# Altium PCB PCB1.PcbDoc
Units mm, origin at the board's own origin, x right, y up, seen from the top; angles counter-clockwise.
Board outline 50 x 50 mm, 2 copper layers (Top Layer, Bottom Layer); 9 components, 6 nets, 20 pads, 0 vias.
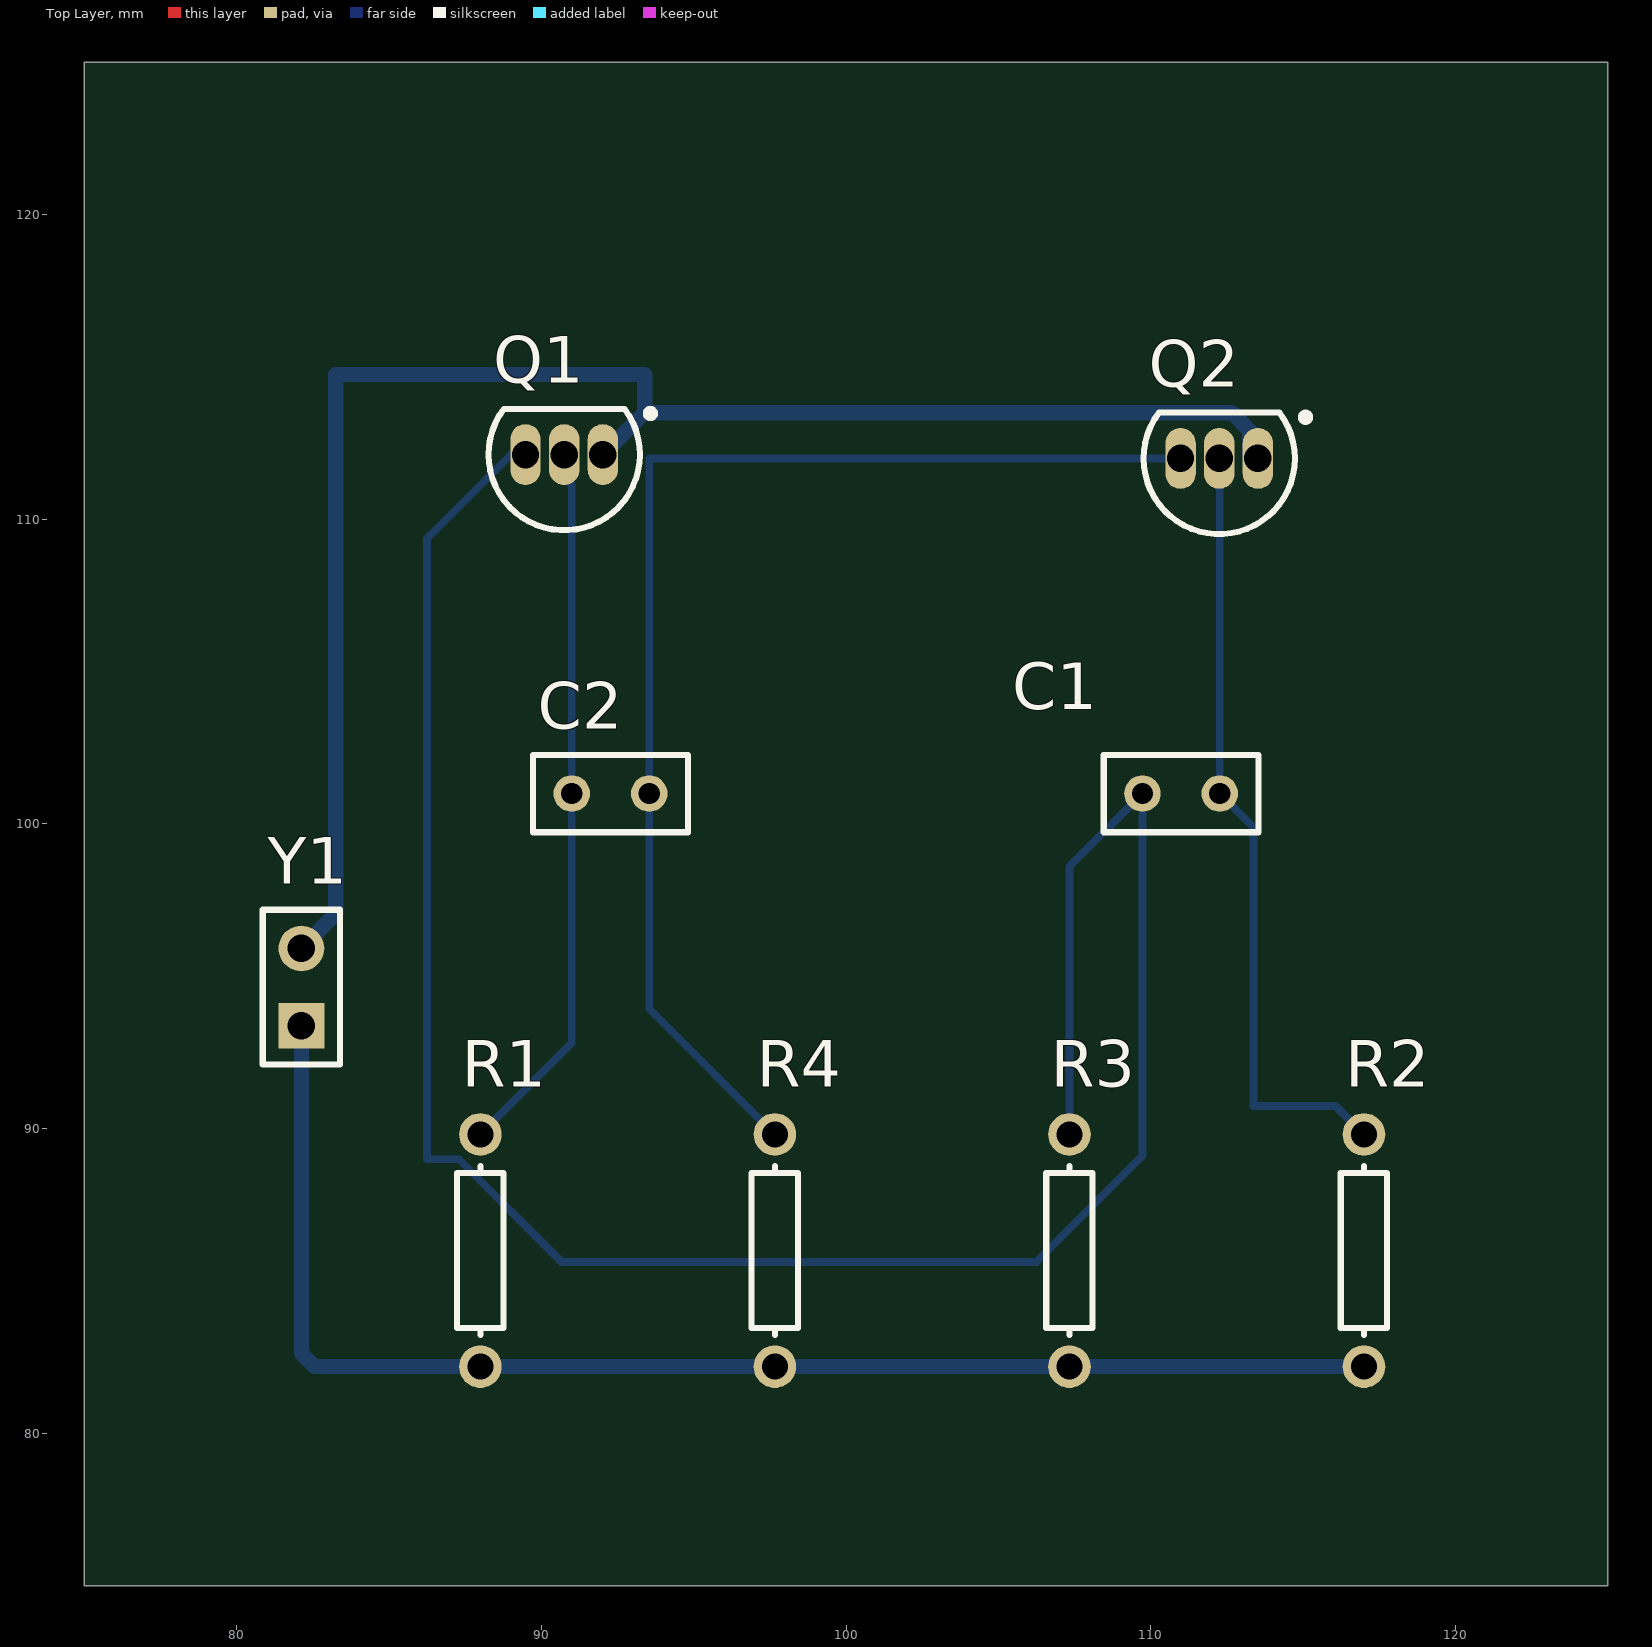
[diagram p0: Top Layer view]
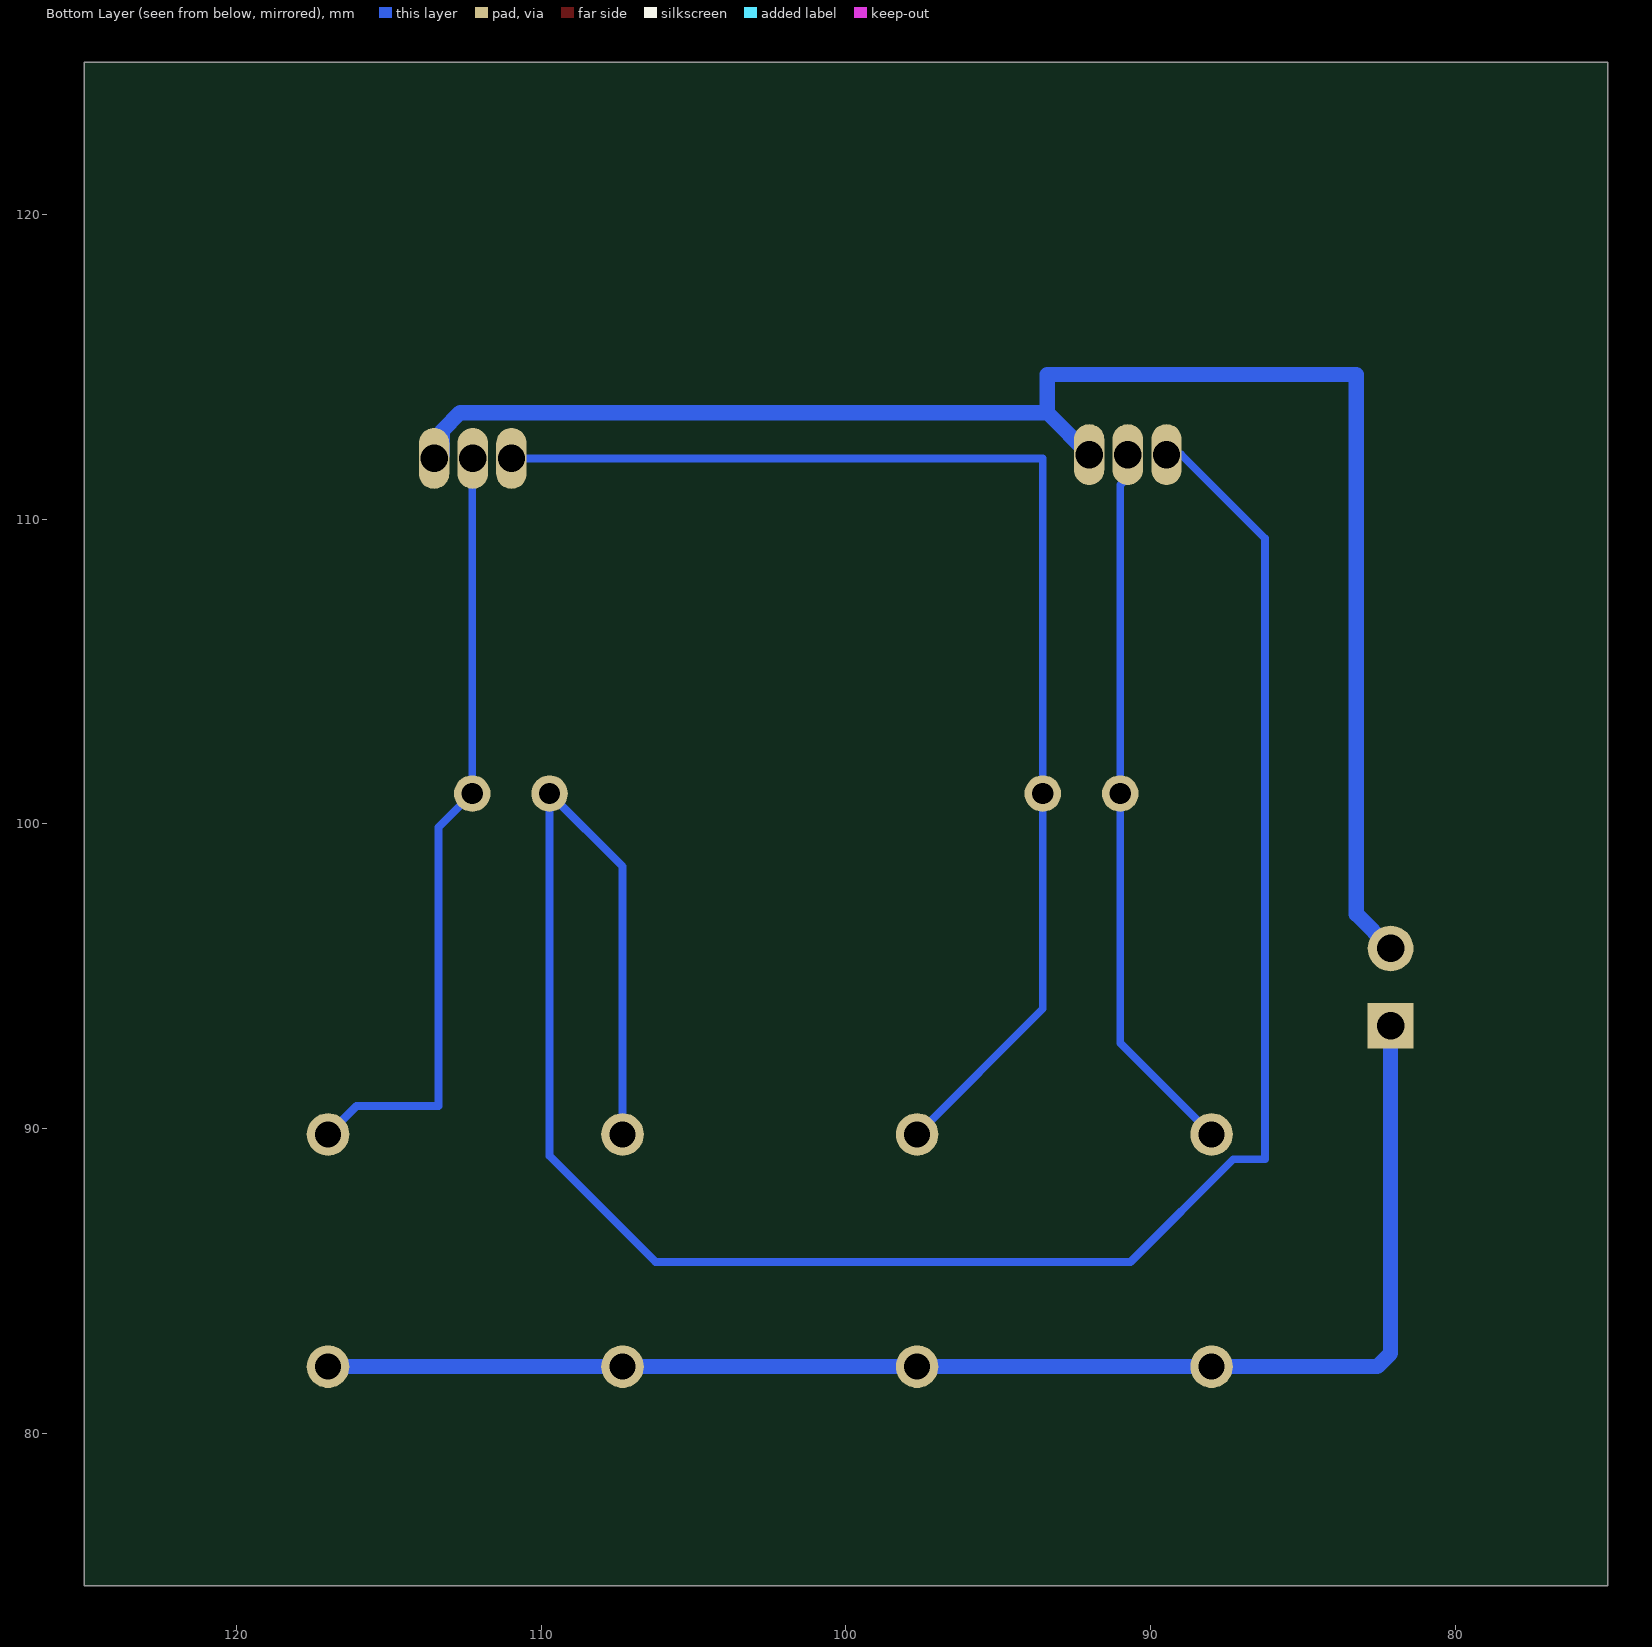
[diagram p1: Bottom Layer view, seen from below]

## Layer stack, top to bottom
Top Solder: solder mask 0.01, Solder Resist, Dk 3.5
Top Layer: signal copper 0.035
Dielectric1: dielectric 0.32, FR-4, Dk 4.8
Bottom Layer: signal copper 0.035
Bottom Solder: solder mask 0.01, Solder Resist, Dk 3.5

## Board outline
75,75 75,125 125,125 125,75

## Design rules (kind name [scope] priority, off if disabled: settings)
Clearance [All] p1: gap=0.25
FabricationTestPointUsage TestPointUsage [All] p1: valid=0 allowmultiple=FALSE
FabricationTestpoint Testpoint [All] p1: side=3 testpointundercomponent=TRUE minsize=1.016 maxsize=2.54 preferedsize=1.524 minholesize=0 maxholesize=1.016 preferedholesize=0.813 testpointgrid=0.025 allowsidetop=TRUE allowsidebottom=TRUE usegrid=TRUE gridtolerance=0
PolygonConnect [All] p1: connectstyle=Relief reliefconductorwidth=0.254 reliefentries=4 polygonreliefangle="90 Angle" airgapwidth=0.254
RoutingVias [All] p1: holewidth=0.6 width=1 viastyle="Through Hole" minholewidth=0.6 minwidth=1 maxholewidth=0.6 maxwidth=1
SilkToSolderMaskClearance SilkscreenOverComponentPads [IsPad] p1: minsilkscreentomaskgap=0.254 clearancetoexposedcopper=TRUE
SolderMaskExpansion [All] p1: expansion=0.102
Width Width_power [(InNet('12V') OR InNet('GND'))] p1: maxlimit=0.5 minlimit=0.25 preferedwidth=0.5 minimp=50.000000 maximp=50.000000 favimp=50.000000
Width [All] p2: maxlimit=0.254 minlimit=0.254 preferedwidth=0.254
27 further rules are at their usual default settings.

## Components (designator, comment, footprint, x,y, rotation, side; value= is the part's Value field where it differs from the comment)
C1 "20n" RAD-0.1 111,101 r0 top
C2 "20n" RAD-0.1 92.27,101 r0 top
Q1 "2N3904" TO-92A 90.75,112.125 r90 top
Q2 "2N3904" TO-92A 112.25,112 r90 top
R1 "100K" AXIAL-0.3 88,86 r270 top
R2 "100K" AXIAL-0.3 117,86 r270 top
R3 "1K" AXIAL-0.3 107.333,86 r270 top
R4 "1K" AXIAL-0.3 97.667,86 r270 top
Y1 "Header 2" HDR1X2 82.125,93.375 r90 top

## Footprints (in the part's own frame and the unit in brackets; to place one, negate y for a bottom-side part, rotate by r counter-clockwise, add the part's x,y. Pads: shape width x height; smd on the part's side, far side on the other; paste and mask are expansions set on the pad)
AXIAL-0.3 [mm] "Axial Device, Thru-Hole; 2 Leads; 0.3 in Pin Spacing"
  round 1.4 hole 0.85: 1(-3.81,0) 2(3.81,0)
  silkscreen extent -2.77,-0.76 2.77,0.76
HDR1X2 [mm] "Connector; Header; 2 Position"
  rect 1.5x1.5 hole 0.9: 1(0,0)
  round 1.5 hole 0.9: 2(2.54,0)
  silkscreen extent -1.27,-1.27 3.81,1.27
RAD-0.1 [mm] "Radial Cap, Thru-Hole; 2 Leads; 0.1 in Pin Spacing"
  round 1.2 hole 0.7: 1(-1.27,0) 2(1.27,0)
  silkscreen extent -2.54,-1.27 2.54,1.27
TO-92A [mm] "TO, Flat Index; 3 In-Line, Axial Leads; Body Dia. 4.5mm; Leads 0.51 x 0.48 mm (max)"
  oval 2x1 hole 0.9: 1(0,-1.27) 2(0,0) 3(0,1.27)
  silkscreen extent -2.48,-2.96 1.5,2.48, body extent -2.5,-2.5 1.5,2.5, height 6.86

## Part data
C1 C2: library part Cap, "Capacitor"
Q1 Q2: "NPN General Purpose Amplifier"
R1 R2 R3 R4: library part Res1, "Resistor"
Y1: "Header, 2-Pin"

## Nets (pads, with @x,y where several pads share a name; then routed paths per layer and width w, separated by ;. In a path a pad name is that pad's centre, name@x,y a point inside that pad or via, vN(x,y) a via of type N, cw(c..) or ccw(c..) an arc to the next point about the centre after c; other vN are vias at no path point)
12V: R1.2 R2.2 R3.2 R4.2 Y1.1 | length 45.8
  Bottom Layer w0.5: Y1.1 82.125,82.625 82.56,82.19 R1.2 R4.2 R3.2 R2.2
GND: Q1.1 Q2.1 Y1.2 | length 53.9
  Bottom Layer w0.5: Y1.2@82.04,95.915 Y1.2 83.25,97.04 83.25,114.75 93.395,114.75 93.395,113.5 ; Q1.1 93.395,113.5 ; Q2.1 113.395,112.125 113.25,112.125 113.25,112.914 112.664,113.5 93.395,113.5
NetC1_1: C1.1 Q1.3 R3.1 | length 75.1
  Bottom Layer w0.254: Q1.3 89,112.125 86.25,109.375 86.25,89 87.287,89 90.662,85.625 106.25,85.625 109.73,89.105 C1.1 107.333,98.603 R3.1
NetC1_2: C1.2 Q2.2 R2.1 | length 25.8
  Top Layer w0.254: C1.2@112.25,101.02 C1.2
  Bottom Layer w0.254: Q2.2 112.27,111.98 C1.2 113.375,99.895 113.375,90.745 116.065,90.745 R2.1
NetC2_1: C2.1 Q1.2 R1.1 | length 23.7
  Bottom Layer w0.254: R1.1 91,92.81 C2.1 91,111.125 90.75,111.375 Q1.2
NetC2_2: C2.2 Q2.3 R4.1 | length 41.3
  Bottom Layer w0.254: R4.1 93.54,93.937 C2.2 93.54,112 Q2.3

## Silkscreen, mask and mechanical layers (free items; w line width, h text height)
Mechanical 16:
  drawing of 1874 lines, arcs and shapes, not listed
  text "1" at 36.246,189.611 h1.78
  text "2" at 108.89,189.611 h1.78
  text "3" at 182.042,189.611 h1.78
  text "4" at 254.94,189.611 h1.78
  text "A" at 1.905,166.599 h1.78
  text "A" at 288.925,166.599 h1.78
  text "B" at 1.905,118.542 h1.78
  text "B" at 288.925,118.542 h1.78
  text "C" at 1.905,70.028 h1.78
  text "C" at 288.925,70.028 h1.78
  text "ENGINEER:" at 173.99,33.02 h1.14
  text "TITLE:" at 212.09,33.02 h1.14
  text "PCB DESIGNER:" at 173.99,25.527 h1.14
  text "D" at 1.905,22.022 h1.78
  text "D" at 288.925,22.022 h1.78
  text "DATE:" at 173.99,17.78 h1.14
  text "PART NO.:" at 212.09,17.78 h1.14
  text "REV:" at 265.43,17.78 h1.14
  text "Altium Limited" at 140.97,15.24 h1.78
  text ".PRINT_DATE" at 175.26,14.732 h1.78
  text "12a Rodborough Rd" at 140.97,12.7 h1.78
  text "Frenchs Forest" at 140.97,10.16 h1.78
  text "FILE NAME:" at 173.99,10.16 h1.14
  text "DWG NO:" at 212.09,10.16 h1.14
  text "SCALE:" at 265.43,10.16 h1.14
  text "NSW 2086" at 140.97,7.62 h1.78
  text ".PCB_FILE_NAME_NO_PATH" at 175.26,7.112 h1.78
  text "1" at 36.246,1.651 h1.78
  text "2" at 108.89,1.651 h1.78
  text "3" at 182.042,1.651 h1.78
  text "4" at 254.94,1.651 h1.78